# Altium PCB PCB_Radiance.PcbDoc (part 2 of 2)
Units mil, origin at the board's own origin, x right, y up, seen from the top; angles counter-clockwise.
Board outline 2362.21 x 2362.21 mil, 4 copper layers (Top Layer, GroundPlane, PowerPlane, Bottom Layer), stack 58.4 mil thick; 120 components, 82 nets, 399 pads, 12 vias.
Unrouted connection lines stored in the file: 268.
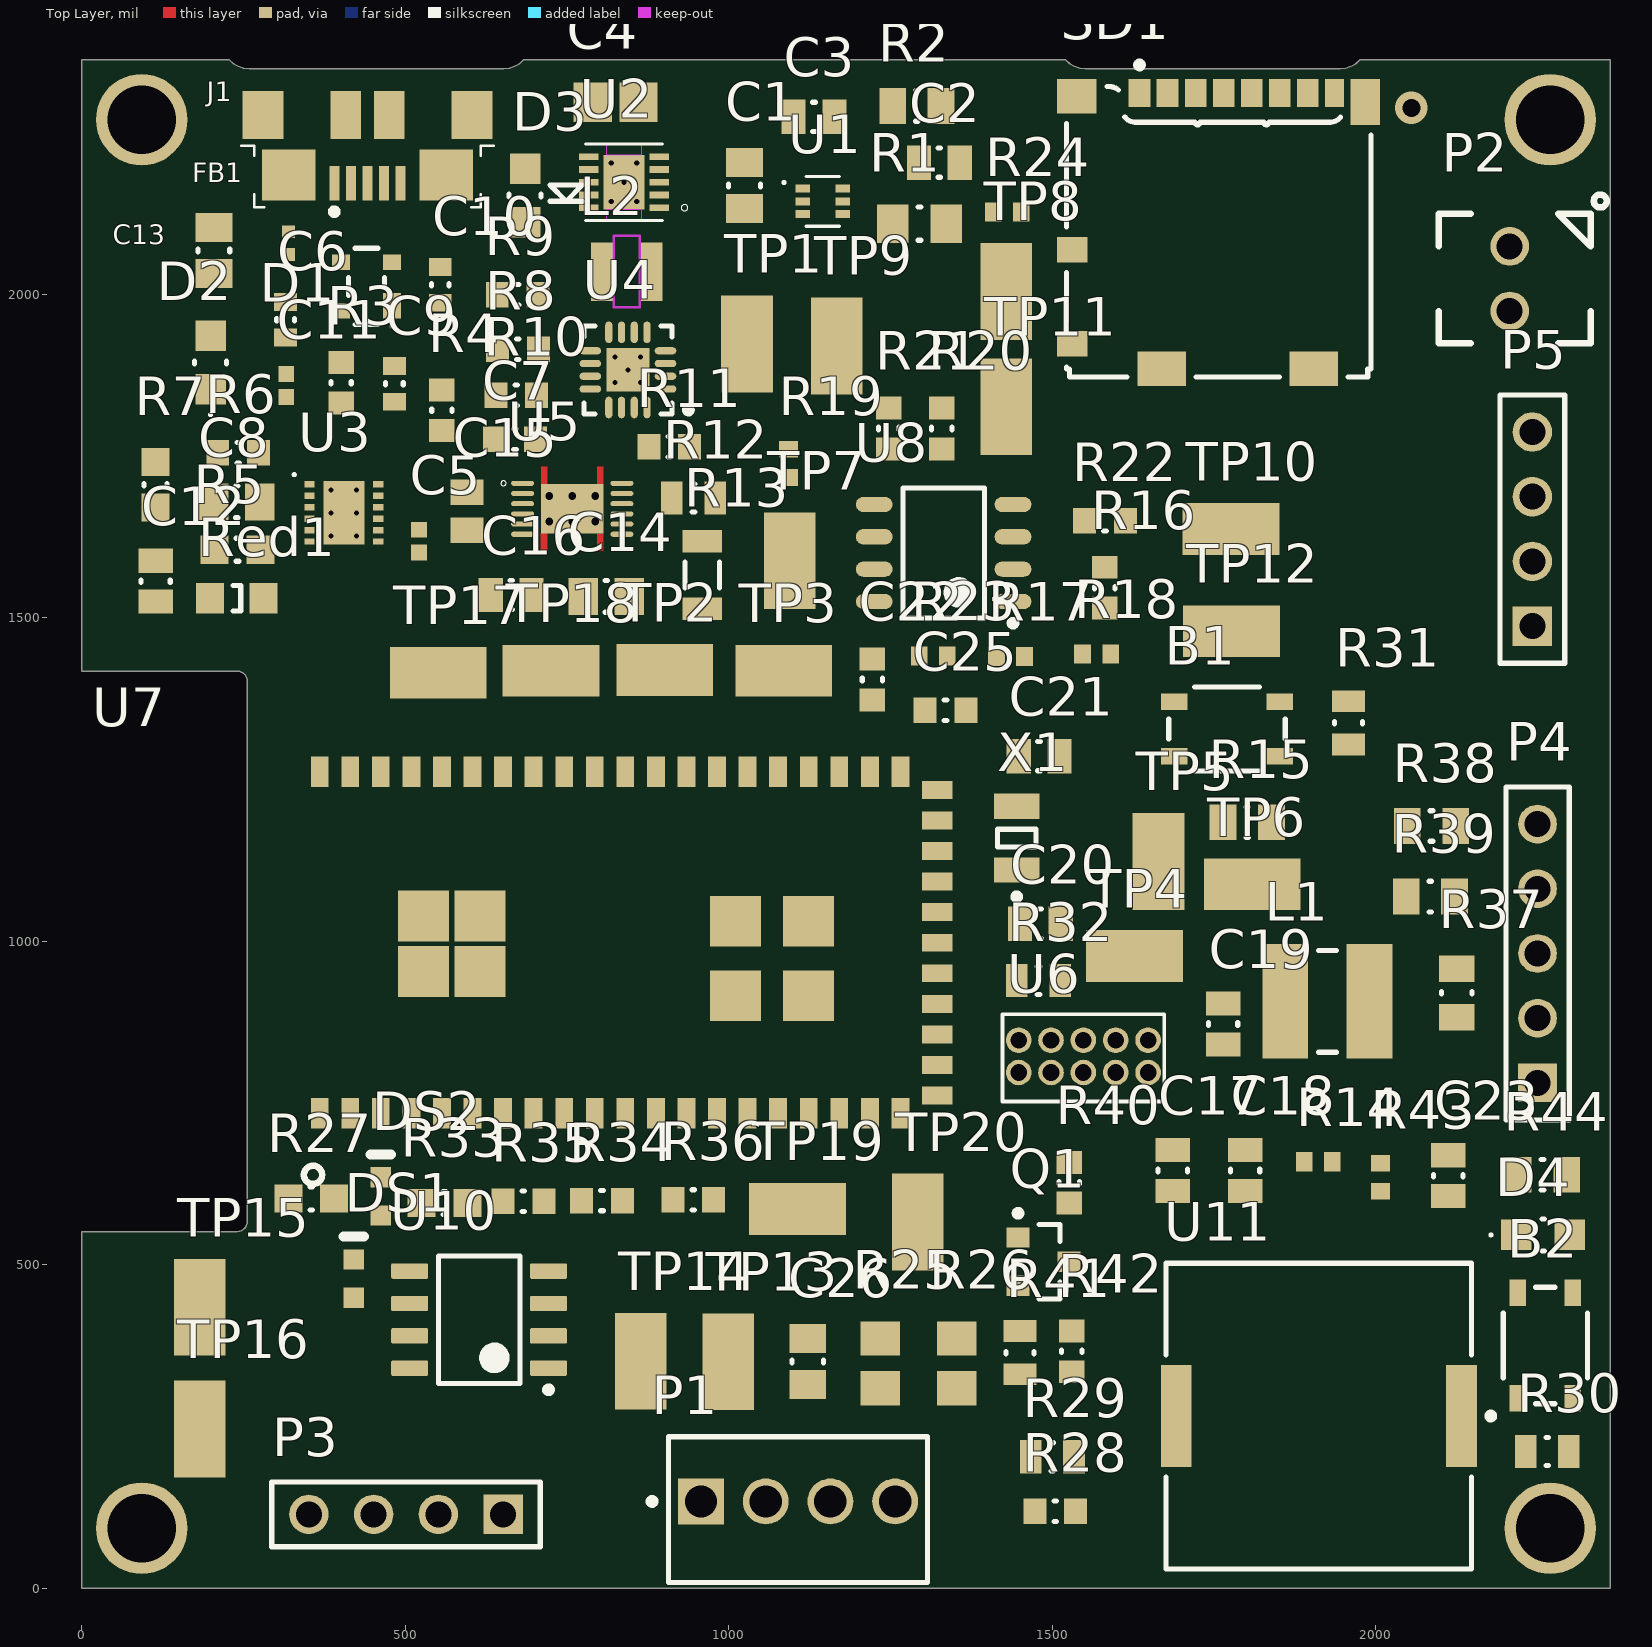
[diagram p0: Top Layer view]

## Part data (continued)
U8: "IC FLASH 8MBIT 100MHZ 8SOIC", Manufacturer="Adesto Technologies", Operating Temperature="-40°C ~ 85°C (TC)", Package=8SOIC, Package / Case="8-SOIC (0.154\", 3.90mm Width)", Supplier Device Package=8-SOIC, Supplier Part Number 1=1265-1166-1-ND, Voltage - Supply="2.7 V ~ 3.6 V", Category="Integrated Circuits (ICs)", ComponentLink1Description=http://www.adestotech.com/wp-content/uploads/doc8715.pdf, ComponentLink1URL=http://www.adestotech.com/wp-content/uploads/doc8715.pdf, ComponentLink2Description=https://datasheet.ciiva.com/14084/doc8715-14084443.pdf, ComponentLink2URL=https://datasheet.ciiva.com/14084/doc8715-14084443.pdf, ComponentLink3Description=https://datasheet.ciiva.com/26910/getdatasheetpartid-730210-26910875.pdf, ComponentLink3URL=https://datasheet.ciiva.com/26910/getdatasheetpartid-730210-26910875.pdf, ComponentLink4Description=https://datasheet.ciiva.com/12251/doc8715-12251468.pdf, ComponentLink4URL=https://datasheet.ciiva.com/12251/doc8715-12251468.pdf, Format - Memory=FLASH, Interface="SPI, RapidS", Manufacturer Part Number=AT25DF081A-SSH-T, Memory Size="8M (4096 pages x 256 bytes)", Memory Type=FLASH, Packaging="Cut Tape (CT)", Part Status=Active, Pricing 1="1=1.18, 10=1.081, 25=1.0516, 50=1.0462, 100=0.9352, 250=0.9324, 500=0.9185, 1000=0.8791 (USD)", Rad Hard=No, RoHS="RoHS Compliant", Speed=100MHz, Stock 1=2550, Supplier 1=Digikey
U10: library part CMP-0272-00397-3, "MicroSIZE, Single-Supply CMOS Operational Amplifier MicroAmplifier(TM) Series, 2.5 to 5.5 V, -40 to 85 degC, 8-pin SOIC (D8), Green (RoHS & no Sb/Br)", Manufacturer="Texas Instruments", Rating=Catalog, Total Supply Voltage(Max)(+5V is 5, +/-5V is 10)=5.5, Total Supply Voltage(Min)(+5V is 5, +/-5V is 10)=2.5, CMRR(Min)(dB)=74, Code_JEDEC=MS-012, ComponentLink1Description="Manufacturer URL", ComponentLink1URL=http://www.ti.com/, ComponentLink2Description=Datasheet, ComponentLink2URL=http://www.ti.com/lit/ds/symlink/opa337.pdf, ComponentLink3Description="Package Specification", ComponentLink3URL=http://www.ti.com/litv/pdf/msoi002j, DatasheetVersion=SBOS077B, Eco-Plan="Green (RoHS & no Sb/Br)", GBW(Typ)(MHz)=3, IIB(Max)(pA)=10, Iq per channel(Max)(mA)=1, Mounting Technology="Surface Mount", Number of Channels=1, Offset Drift(Typ)(uV/C)=2, PackageDescription="8-Pin Plastic Small Outline, Body 4.9 x 3.9 mm, Pitch 1.27 mm", PackageReference=D0008A, PackageVersion="4040047-3/M, 06/2011", Packing="LARGE T&R", PartNumber=OPA337UA/2K5, Slew Rate(Typ)(V/us)=1.2, Sub Family="Low Input Bias Current Amp (<=10pA), Low Supply Voltage Amplifier (<=2.7V), Precision Amplifier", Vio (25C)(Max)(mV)=3
U11: library part CMP-2000-05277-1, "Piezoelectric Sound Component, 4 KHz, -20 to 70 degC, 2-Pin SMD, RoHS, Tape and Reel", Capacitance @ Frequency=-, Frequency=4kHz, Manufacturer=Murata, Operating Mode=Continuous, Operating Temperature=-20degC~70degC, Standard Package=1, Voltage - Rated=3Vp-p, Voltage Range=25V(Max), Category=AudioProducts, Current - Supply=-, Datasheet URL=https://datasheet.ciiva.com/34302/1874527-34302938.pdf, Datasheet Version=Jul-12, Driver Circuitry=Transducer,ExternallyDriven, Family=Buzzers, Featured Product=SMDPiezoelectricSounders, Input Type=peak-peakSignal, Manufacturer URL=http://www.murata.com/, Mounting Type=SurfaceMount, Online Catalog=PKSeries, Other Names=490-4683-6, Packaging=Digi-Reel, Port Location=Side, Series=PK, Size / Dimension=12.0mmLx12.0mmWx3.0mmH, Sound Pressure Level=-, Technology=Piezo, Termination=SolderPads, Washable=No
X1: library part CMP-0463-00001-2, "Crystal, 32.768 KHz, -40 to 85 degC, 3.2 x 1.5 x 0.9 mm SMD", Frequency Tolerance="+/-20 ppm", Load Capacitance="12.5 pF", Manufacturer=ITTI, Nominal Frequency=32.768KHz, Operating Temperature="-40 to 85 degC", ComponentLink1Description="Manufacturer URL", ComponentLink1URL=http://www.itti-co.com, Drive Level="1 max. uw", Mounting Technology="Surface Mount", PackageDescription="2-Pin Hand Drawn, Body 3.2 x 1.5mm, Pitch 2.5 mm", PackageReference=14340272-32.768KHz-2, PartNumber=14340272-32.768KHz

## Free pads (board coordinates)
  round 141.73 hole 106.3 paste-102.36: HH1(92.52,2269.69) HH2(2269.68,2269.69) HH3(92.52,92.52) HH4(2269.68,92.52)

## Via types
v1: diameter 19.68, hole 7.87, Top Layer to Bottom Layer, 6 vias
v2: diameter 19.68, hole 7.87, Top Layer to Bottom Layer, tented top, 5 vias
v3: diameter 50, hole 28, Top Layer to Bottom Layer, 1 vias

## Nets (pads, with @x,y where several pads share a name; then routed paths per layer and width w, separated by ;. In a path a pad name is that pad's centre, name@x,y a point inside that pad or via, vN(x,y) a via of type N, cw(c..) or ccw(c..) an arc to the next point about the centre after c; other vN are vias at no path point)
AT25_CS: R16.2 R17.2 U8.1
AT25_HOLD: R19.2 U8.7
AT25_SCK: R20.2 U8.6
AT25_SI: R21.2 U8.5
AT25_SO: R22.2 U8.2
AT25_WP: R18.2 U8.3
BQ_BAT_TS: R28.2 TP1.1 U4.1
BQ_EN_1: R30.2 U4.6 U7.14
BQ_EN_2: R31.1 U4.5 U7.22
BQ_ILIM: R10.2 U4.12
BQ_Iset: R11.2 U4.16
BQ_SYSOFF: R32.1 U4.15 U7.27
Buzzer: Q1.1 TP20.1 U7.34
Control: P1.2 TP14.1 U7.18
Feedback: C26.2 TP13.1 U7.31 U10.2 U10.6
FLASH_MEM_SPI_SS: R16.1 R23.2 SD1.2 TP12.1 U7.37
GND: B1.3 B1.4 B2.3 B2.4 C1.1 C3.1 C4.2 C5.1 C6.1 C7.1 C8.1 C9.1 C10.1 C11.1 C12.1 C13.1 C15.1 C16.1 C17.1 C18.1 C19.1 C20.2 C21.2 C23.1 C25.1 C26.1 D1.1 J1.5 J1.6 J1.7 J1.8 J1.9 J1.10 J1.11 P1.1 P2.1 P3.1 P4.1 R10.1 R11.1 R12.1 R26.1 R27.2 R29.1 R30.1 R31.2 R32.2 R41.1 R42.1 SD1.6 SD1.10 SD1.11 SD1.12 U1.6 U3.5 U3.13 U4.4 U4.8 U4.14 U4.17 U5.3 U5.13 U6.3 U6.7 U6.9 U7.0 U7.1 U7.10 U7.17 U7.20 U7.32 U7.42 U7.51 U8.4 U10.4 | length 5.3
  Top Layer w30: SD1.12 SD1.12@1987.42,2301
  other v1: 385.32,1626.57 424.68,1626.57 385.32,1662 424.68,1662 385.32,1697.43 424.68,1697.43
  other v2: 824.31,1863.31 863.68,1863.31 844,1883 824.31,1902.69 863.68,1902.69
Guage_Int: R37.2 TP2.1 U5.12 U7.36
INT_2: P4.2 TP19.1 U7.13
MCU_LED: DS2.2 U7.16
MCU_RESET: C19.2 R14.2 R15.1 TP6.1 U6.10 U7.24
MEM_SPI_CLK: R20.1 R36.2 SD1.5 TP11.1
MEM_SPI_MISO: R22.1 R35.2 SD1.7 TP10.1
MEM_SPI_MOSI: R21.1 R34.2 SD1.3 TP9.1
NetB1_1: B1.1 B1.2 R15.2
NetB2_1: B2.1 B2.2 D4.C
NetC2_1: C2.1 R2.1
NetC4_1: C4.1 U2.6
NetC11_2: C11.2 R6.2 R7.2 U3.2
NetC14_1: C14.1 U4.2 U4.3
NetC15_2: C15.2 U5.5
NetC16_2: C16.2 U5.6
NetC22_2: C22.2 U8.8
NetD2_C: D2.C R8.2
NetD3_2: D3.2 R9.2
NetD4_A: D4.A R44.2
NetDS1_2: DS1.2 R27.1
NetDS2_1: DS2.1 R33.2
NetL1_1: L1.1 U1.3
NetL2_1: L2.1 U2.1 U2.2
NetP1_3: P1.3 R25.2
NetP5_1: P5.1 U7.33
NetP5_2: P5.2 U7.35
NetP5_3: P5.3 U7.40
NetP5_4: P5.4 U7.41
NetQ1_2: Q1.2 R41.2 R42.2
NetQ1_3: Q1.3 R40.1 U11.2
NetR1_1: R1.1 R2.2 U1.4
NetR3_2: R3.2 U3.1
NetR4_2: R4.2 U3.12
NetR5_1: R5.1 Red1.2
NetR8_1: R8.1 U4.9
NetR9_1: R9.1 U4.7
NetR12_2: R12.2 U5.10
NetR13_1: R13.1 U5.8
NetR25_1: R25.1 R26.2 U10.3
NetR28_1: R28.1 R29.2
NetRed1_1: Red1.1 U3.6
SCL_2: P4.4 R38.2 TP17.1 U5.2 U7.39
SCL_IR: P3.3 TP15.1 U7.9
SD_CARD_DETECT: R24.2 SD1.9 TP8.1
SDA_2: P4.3 R39.2 TP18.1 U5.1 U7.38
SDA_IR: P3.2 TP16.1 U7.15
SERCOM1_PAD2_SPI_MISO: R35.1 U7.8
SERCOM1_PAD2_SPI_MOSI: R34.1 U7.11
SERCOM1_PAD3_SPI_SCK: R36.1 U7.12
SERCOM4_UART_RX_CLI: U3.7 U7.43
SERCOM4_UART_TX_CLI: U3.10 U7.44
SWCLK: TP4.1 U6.2 U7.25
SWDIO: TP5.1 U6.4 U7.26
TEST_BUTTON: C23.2 R43.2 R44.1 U7.28
USB_DATA_N: C9.2 D1.3 J1.2 R3.1
USB_DATA_P: C10.2 D1.2 J1.3 R4.1
V_5V: C1.2 C3.2 DS1.1 P1.4 U1.1 U2.3 U2.4 U2.7 U10.7
Vbat: C14.2 P2.2 R13.2 TP3.1 U5.7
VBUS: C6.2 D1.4 FB1.1 J1.1
VCC_MCU: C2.2 C17.2 C18.2 C22.1 C25.2 L1.2 P3.4 P4.5 R1.2 R14.1 R17.1 R18.1 R19.1 R23.1 R24.1 R33.1 R37.1 R38.1 R39.1 R40.2 R43.1 SD1.4 TP7.1 U6.1 U7.7 U7.21 U11.1
VCCIO: C5.2 R6.1 U3.3 U3.9
Vin: C13.2 D2.A D3.1 L2.2 U2.9 U2.10 U4.10 U4.11
VUSB: C7.2 C8.2 C12.2 FB1.2 R5.2 R7.1 U3.4 U4.13
XIN_32: C20.1 U7.29 X1.1
XOUT_32: C21.1 U7.30 X1.2
pads on no net: J1.4 SD1.1 SD1.8 SD1.13 SD1.14 U1.2 U1.5 U2.5 U2.8 U2.11 U2.P$1 U2.P$2 U2.P$3 U2.P$4 U2.P$5 U3.8 U3.11 U5.4 U5.9 U5.11 U5.14 U5.15 U5.16 U5.17 U5.18 U5.19 U6.5 U6.6 U6.8 U7.2 U7.3 U7.4 U7.5 U7.6 U7.19 U7.23 U7.45 U7.46 U7.47 U7.48 U7.49 U7.50 U10.1 U10.5 U10.8
copper on no net: | length 5.4
  GroundPlane w30: v3@2051.17,2291.83 v3(2055,2288)

## Other copper
Top Layer:
  region: 990.16,1868.07

## Silkscreen, mask and mechanical layers (free items; w line width, h text height)
Mechanical 1:
  the board outline again, w10

## Text inside footprints (layer, text, board x,y; h text height)
J1: Mechanical 1 "Board edge" at 221.54,2329.34 h7.87 r180